# Altium PCB TSSOP-20_L6.5-W4.4-P0.65-LS6.4-BL_2021-01-15.pcbdoc
Units mm, origin at the board's own origin, x right, y up, seen from the top; angles counter-clockwise.
Board outline 37.17 x 33.15 mm, 2 copper layers (Top Layer, Bottom Layer); 1 components, 0 nets, 20 pads, 0 vias.
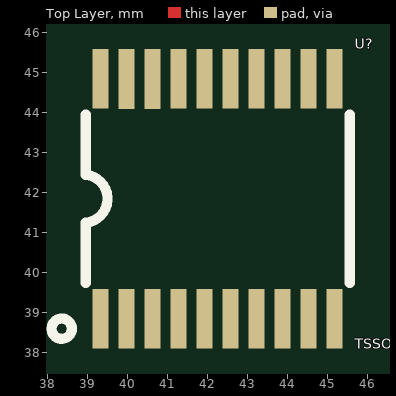
[diagram p0: Top Layer view]
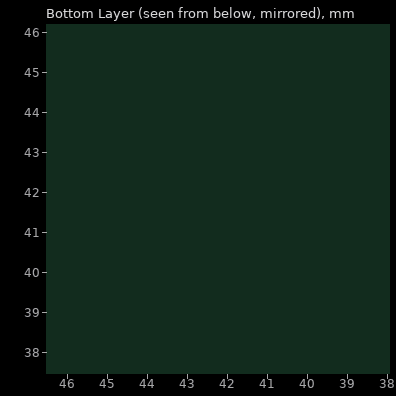
[diagram p1: Bottom Layer view, seen from below]

## Layer stack, top to bottom
Top Layer: signal copper (thickness not stored)
Dielectric: dielectric 0.32, FR-4, Dk 4.8
Bottom Layer: signal copper (thickness not stored)

## Board outline
62.572,25.4 25.4,25.4 25.4,58.55 62.572,58.55

## Components (designator, comment, footprint, x,y, rotation, side; value= is the part's Value field where it differs from the comment)
U? "TSSOP-20_L6.5-W4.4-P0.65-LS6.4-BL" TSSOP-20_L6.5-W4.4-P0.65-LS6.4-BL 41.891,41.848 r0 top

## Footprints (in the part's own frame and the unit in brackets; to place one, negate y for a bottom-side part, rotate by r counter-clockwise, add the part's x,y. Pads: shape width x height; smd on the part's side, far side on the other; paste and mask are expansions set on the pad)
TSSOP-20_L6.5-W4.4-P0.65-LS6.4-BL [mm]
  rect 0.4x1.494 smd: 1(-2.562,-3.001) 2(-1.912,-3.001) 3(-1.262,-3.001) 4(-0.612,-3.001) 5(0.038,-3.001) 6(0.687,-3.001) 7(1.338,-3.001) 8(1.988,-3.001) 9(2.638,-3.001) 10(3.288,-3.001) 11(3.288,3.001) 12(2.638,3.001) 13(1.988,3.001) 14(1.338,3.001) 15(0.688,3.001) 16(0.038,3.001) 17(-0.612,3.001) 18(-1.262,2.996) 19(-1.912,2.996) 20(-2.562,3.001)
  silkscreen extent -3.79,-3.5 3.66,2.1

## Nets (pads, with @x,y where several pads share a name; then routed paths per layer and width w, separated by ;. In a path a pad name is that pad's centre, name@x,y a point inside that pad or via, vN(x,y) a via of type N, cw(c..) or ccw(c..) an arc to the next point about the centre after c; other vN are vias at no path point)
pads on no net: U?.1 U?.2 U?.3 U?.4 U?.5 U?.6 U?.7 U?.8 U?.9 U?.10 U?.11 U?.12 U?.13 U?.14 U?.15 U?.16 U?.17 U?.18 U?.19 U?.20

## Silkscreen, mask and mechanical layers (free items; w line width, h text height)
Document:
  lines w0.003: 43.961,41.949 44.012,42